# Altium PCB BF706_Core.PcbDoc (part 2 of 2)
Units mil, origin at the board's own origin, x right, y up, seen from the top; angles counter-clockwise.
Board outline 1878 x 1180 mil, 4 copper layers (Top Layer, GND, PWR, Bottom Layer), stack 40.642 mil thick; 58 components, 77 nets, 288 pads, 225 vias.
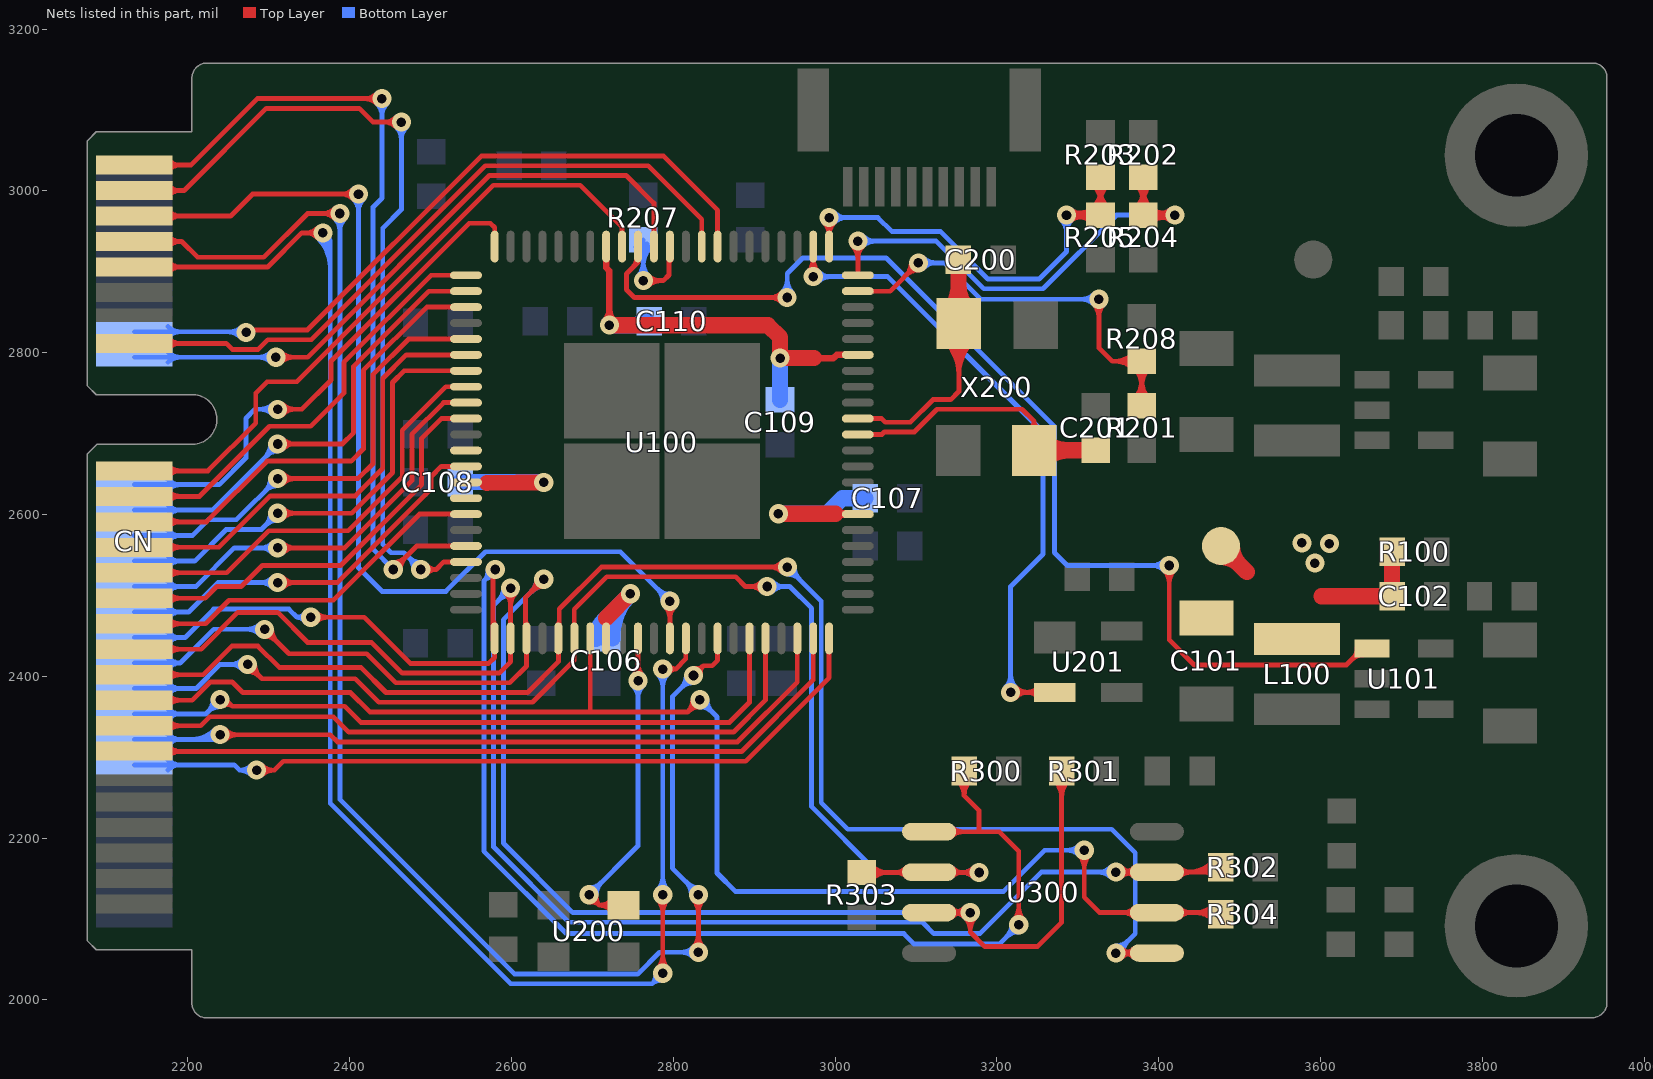
[diagram p4: the nets of this part, all layers, seen from the top]

## Via types
v1: diameter 23.62, hole 11.81, Top Layer to Bottom Layer, tented both sides, 225 vias

## Nets (pads, with @x,y where several pads share a name; then routed paths per layer and width w, separated by ;. In a path a pad name is that pad's centre, name@x,y a point inside that pad or via, vN(x,y) a via of type N, cw(c..) or ccw(c..) an arc to the next point about the centre after c; other vN are vias at no path point) (continued)
PB05: CN.40 U100.44 | length 1056.9
  Top Layer w6: v1(2285,2284) 2307,2284 2318,2295 2889.35,2295 2992.69,2398.34 U100.44@2992.69,2446.87 ; v1@2291.23,2277.77 cw(c2306.27,2262.73) 2306.27,2284 cw(c2306.27,2305.27) v1@2291.23,2290.23
  Bottom Layer w6: CN.40@2134,2290.49 2257.51,2290.49 2264,2284 ; CN.40@2175.66,2284.26 cw(c2190.7,2269.22) 2190.7,2290.49 cw(c2190.7,2311.76) CN.40@2175.66,2296.72 ; v1@2278.71,2277.83 ccw(c2264,2263.38) 2264,2284 ; v1@2278.71,2290.17 cw(c2264,2304.62) 2264,2284 ; v1(2285,2284) 2264,2284
PB06: CN.39 U100.43 | length 960.4
  Top Layer w6: CN.39@2134,2307 2884.38,2307 2973.01,2395.62 U100.43@2973.01,2446.87 ; CN.39@2175.66,2301.26 cw(c2189.53,2287.39) 2189.53,2307 ; CN.39@2175.66,2313.72 ccw(c2191.88,2329.94) 2191.88,2307
PB07: CN.38 U100.42 | length 1030.5
  Top Layer w6: v1(2240,2327.88) 2376.12,2327.88 2385,2319 2879.41,2319 2953.32,2392.91 U100.42@2953.32,2446.87 ; v1@2246.23,2321.65 cw(c2261.27,2306.61) 2261.27,2327.88 cw(c2261.27,2349.15) v1@2246.23,2334.11
  Bottom Layer w6: CN.38@2134,2321.98 2234.1,2321.98 v1(2240,2327.88) ; CN.38@2175.66,2315.75 cw(c2190.7,2300.71) 2190.7,2321.98 cw(c2190.7,2343.26) CN.38@2175.66,2328.21 ; 2204.49,2321.98 ccw(c2204.49,2363.39) v1@2233.77,2334.11 ; 2218.97,2321.98 ccw(c2218.97,2348.91) v1@2238.01,2329.87
PC02: CN.27 U100.10 | length 568.7
  Top Layer w6: CN.27@2134,2496.46 2221.46,2496.46 2236,2511 2266,2511 2292,2537 2389.06,2537 2489,2636.94 2489,2694.06 2513.47,2718.53 U100.10@2543.87,2718.53 ; CN.27@2175.66,2490.23 cw(c2190.7,2475.19) 2190.7,2496.46 cw(c2190.7,2517.74) CN.27@2175.66,2502.69
PC03: CN.26 U100.9 | length 637.7
  Top Layer w6: v1(2311,2558.67) 2393.76,2558.67 2477,2641.91 2477,2699.03 2516.18,2738.21 U100.9@2543.87,2738.21 ; v1@2317.23,2552.44 cw(c2332.27,2537.39) 2332.27,2558.67 cw(c2332.27,2579.94) v1@2317.23,2564.9
  Bottom Layer w6: CN.26@2134,2510.96 2209.96,2510.96 2257.67,2558.67 v1(2311,2558.67) ; CN.26@2175.66,2504.73 cw(c2190.7,2489.69) 2190.7,2510.96 cw(c2190.7,2532.23) CN.26@2175.66,2517.19 ; v1@2304.77,2552.44 ccw(c2289.73,2537.39) 2289.73,2558.67 ccw(c2289.73,2579.94) v1@2304.77,2564.9
PC04: CN.25 U100.8 | length 572
  Top Layer w6: CN.25@2134,2527.96 2247.96,2527.96 2300,2580 2398.12,2580 2465,2646.88 2465,2704 2518.9,2757.9 U100.8@2543.87,2757.9 ; CN.25@2175.66,2521.73 cw(c2190.7,2506.69) 2190.7,2527.96 cw(c2190.7,2549.23) CN.25@2175.66,2534.19
PC05: CN.24 U100.7 | length 672.7
  Top Layer w6: v1(2311,2601.5) 2402.65,2601.5 2453,2651.85 2453,2763.15 2467.44,2777.58 U100.7@2543.87,2777.58 ; v1@2317.23,2595.27 cw(c2332.27,2580.23) 2332.27,2601.5 cw(c2332.27,2622.77) v1@2317.23,2607.73
  Bottom Layer w6: CN.24@2134,2542.46 2208.46,2542.46 2247.45,2581.45 2290.95,2581.45 v1(2311,2601.5) ; CN.24@2175.66,2536.23 cw(c2190.7,2521.18) 2190.7,2542.46 cw(c2190.7,2563.73) CN.24@2175.66,2548.69 ; v1@2302.19,2601.5 cw(c2280.92,2601.5) 2295.96,2586.46 cw(c2311,2571.42) v1@2311,2592.69
PC06: CN.23 U100.6 | length 607
  Top Layer w6: CN.23@2134,2559.46 2238.46,2559.46 2302,2623 2407.18,2623 2441,2656.82 2441,2768.12 2470.15,2797.27 U100.6@2543.87,2797.27 ; CN.23@2175.66,2553.23 cw(c2190.7,2538.18) 2190.7,2559.46 cw(c2190.7,2580.73) CN.23@2175.66,2565.69
PC07: CN.22 U100.5 | length 675.3
  Top Layer w6: v1(2311,2644.33) 2410.33,2644.33 2429,2663 2429,2773.09 2472.86,2816.95 U100.5@2543.87,2816.95 ; v1@2317.23,2638.1 cw(c2332.27,2623.06) 2332.27,2644.33 cw(c2332.27,2665.6) v1@2317.23,2650.56
  Bottom Layer w6: CN.22@2134,2573.95 2205.64,2573.95 2225.14,2593.45 2260.12,2593.45 v1(2311,2644.33) ; CN.22@2175.66,2567.72 cw(c2190.7,2552.68) 2190.7,2573.95 cw(c2190.7,2595.22) CN.22@2175.66,2580.18 ; v1@2302.19,2644.33 cw(c2280.92,2644.33) 2295.96,2629.29 cw(c2311,2614.25) v1@2311,2635.52
PC08: CN.21 U100.3 | length 610.1
  Top Layer w6: CN.21@2134,2590.95 2222.95,2590.95 2298,2666 2402,2666 2417,2681 2417,2778.06 2495.26,2856.32 U100.3@2543.87,2856.32 ; CN.21@2175.66,2584.72 cw(c2190.7,2569.68) 2190.7,2590.95 cw(c2190.7,2612.22) CN.21@2175.66,2597.18
PC09: CN.20 U100.2 | length 670.9
  Top Layer w6: v1(2311,2687.17) 2391.17,2687.17 2405,2701 2405,2783.03 2497.98,2876.01 U100.2@2543.87,2876.01 ; v1@2317.23,2680.94 cw(c2332.27,2665.89) 2332.27,2687.17 cw(c2332.27,2708.44) v1@2317.23,2693.4
  Bottom Layer w6: CN.20@2134,2605.45 2230.49,2605.45 2311,2685.96 v1(2311,2687.17) ; CN.20@2175.66,2599.22 cw(c2190.7,2584.18) 2190.7,2605.45 cw(c2190.7,2626.72) CN.20@2175.66,2611.68 ; 2295.1,2670.06 ccw(c2277.99,2687.17) v1@2302.19,2687.17 ; 2298.03,2672.98 cw(c2311,2660.01) v1@2311,2678.36
PC10: CN.19 U100.1 | length 578.7
  Top Layer w6: CN.19@2134,2622.45 2214.45,2622.45 2301,2709 2352,2709 2393,2750 2393,2788 2500.69,2895.69 U100.1@2543.87,2895.69 ; CN.19@2175.66,2616.22 cw(c2190.7,2601.18) 2190.7,2622.45 cw(c2190.7,2643.72) CN.19@2175.66,2628.68
SCL: CN.3 U100.19 | length 1191.8
  Top Layer w6: CN.3@2134,3000.4 2195.4,3000.4 2297,3102 2412,3102 2429,3085 v1(2464,3085) ; CN.3@2175.66,2994.17 cw(c2190.7,2979.13) 2190.7,3000.4 cw(c2190.7,3021.67) CN.3@2175.66,3006.63 ; v1@2457.77,3078.77 ccw(c2442.73,3063.73) 2442.73,3085 ccw(c2442.73,3106.27) v1@2457.77,3091.23 ; v1(2488,2532) 2507,2532 ; v1@2494.73,2526.31 cw(c2507,2515.92) 2507,2532 ; v1@2494.73,2537.69 ccw(c2507,2548.08) 2507,2532 ; U100.19@2543.87,2541.36 2516.36,2541.36 2507,2532
  Bottom Layer w6: v1@2457.77,3078.77 cw(c2442.73,3063.73) 2464,3063.73 cw(c2485.27,3063.73) v1@2470.23,3078.77 ; v1(2464,3085) 2464,2977 2441,2954 2441,2563 2451.19,2552.81 2467.19,2552.81 v1(2488,2532) ; v1@2479.19,2532 ccw(c2457.92,2532) 2472.96,2547.04 ccw(c2488,2562.08) v1@2488,2540.81
SDA: CN.1 U100.18 | length 1172.5
  Top Layer w6: CN.1@2134,3031.9 2203.9,3031.9 2286,3114 v1(2440,3114) ; CN.1@2175.66,3025.67 cw(c2190.7,3010.63) 2190.7,3031.9 cw(c2190.7,3053.17) CN.1@2175.66,3038.13 ; v1@2433.77,3107.77 ccw(c2418.73,3092.73) 2418.73,3114 ccw(c2418.73,3135.27) v1@2433.77,3120.23 ; v1(2454,2532) 2483.05,2561.05 U100.18@2543.87,2561.05 ; v1@2454,2540.81 ccw(c2454,2562.08) 2469.04,2547.04 ccw(c2484.08,2532) v1@2462.81,2532
  Bottom Layer w6: v1@2433.77,3107.77 cw(c2418.73,3092.73) 2440,3092.73 cw(c2461.27,3092.73) v1@2446.23,3107.77 ; v1(2440,3114) 2440,2991 2429,2980 2429,2557 v1(2454,2532)
SPI1_CLK: CN.18 U100.88 | length 747.4
  Top Layer w6: v1(2311,2730) 2341,2730 2377,2766 2377,2789.24 2547.76,2960 2574,2960 2579.31,2954.69 U100.88@2579.31,2931.13 ; v1@2317.23,2723.77 cw(c2332.27,2708.73) 2332.27,2730 cw(c2332.27,2751.27) v1@2317.23,2736.23
  Bottom Layer w6: CN.18@2134,2636.94 2238.94,2636.94 2272,2670 2272,2719 2283,2730 v1(2311,2730) ; CN.18@2175.66,2630.71 cw(c2190.7,2615.67) 2190.7,2636.94 cw(c2190.7,2658.22) CN.18@2175.66,2643.18 ; v1@2304.77,2723.77 ccw(c2289.73,2708.73) 2289.73,2730 ccw(c2289.73,2751.27) v1@2304.77,2736.23
SPI1_MISO: CN.17 U100.80 | length 849.7
  Top Layer w6: CN.17@2134,2653.94 2224.94,2653.94 2284,2713 2284,2750 2298,2764 2334.79,2764 2577.79,3007 2685,3007 2736.79,2955.21 U100.80@2736.79,2931.13 ; CN.17@2175.66,2647.71 cw(c2190.7,2632.67) 2190.7,2653.94 cw(c2190.7,2675.22) CN.17@2175.66,2660.18
SPI1_MOSI: CN.16 U100.78 | length 903.3
  Top Layer w6: v1(2309,2794.42) 2348.24,2794.42 2572.82,3019 2742,3019 2776.16,2984.84 U100.78@2776.16,2931.13 ; v1@2315.23,2788.19 cw(c2330.27,2773.15) 2330.27,2794.42 cw(c2330.27,2815.69) v1@2315.23,2800.65
  Bottom Layer w6: CN.16@2134,2794.42 v1(2309,2794.42) ; CN.16@2175.66,2788.19 cw(c2190.7,2773.15) 2190.7,2794.42 cw(c2190.7,2815.7) CN.16@2175.66,2800.66 ; 2287.71,2794.42 cw(c2287.71,2773.13) v1@2302.77,2788.19 ; 2287.75,2794.42 ccw(c2287.75,2815.67) v1@2302.77,2800.65
SPI1_SEL1: CN.14 U100.74 | length 949.5
  Top Layer w6: v1@2272,2828 2347.88,2828 2562.88,3043 2788,3043 2854.9,2976.1 U100.74@2854.9,2931.13
  Bottom Layer w6: CN.14@2134,2825.92 v1@2272,2825.92 ; CN.14@2175.66,2819.69 cw(c2190.7,2804.65) 2190.7,2825.92 cw(c2190.7,2847.19) CN.14@2175.66,2832.15 ; 2248.5,2825.92 cw(c2248.5,2801.5) v1@2265.77,2818.77 ; 2252.95,2825.92 ccw(c2252.95,2844.05) v1@2265.77,2831.23
  other v1: 2272,2825
SPI1_SEL2: CN.15 U100.75 | length 892.8
  Top Layer w6: CN.15@2134,2811.42 2247.58,2811.42 2255,2804 2287,2804 2299,2816 2352.85,2816 2567.85,3031 2769,3031 2835.21,2964.79 U100.75@2835.21,2931.13 ; CN.15@2175.66,2805.19 cw(c2190.7,2790.15) 2190.7,2811.42 cw(c2190.7,2832.7) CN.15@2175.66,2817.66
SPI2_CLK: CN.35 R304.1 U100.29 U300.6 | length 2062.9
  Top Layer w6: CN.35@2134,2370.48 2205.48,2370.48 2228,2393 2255,2393 2268,2380 2401,2380 2425,2356 2697.42,2356 ; CN.35@2175.66,2364.25 cw(c2190.7,2349.21) 2190.7,2370.48 cw(c2190.7,2391.75) CN.35@2175.66,2376.71 ; U100.29@2699,2448.46 U100.29@2697.42,2446.87 2697.42,2356 ; v1@2824.19,2370.98 cw(c2803.06,2370.94) 2818,2356 ; v1@2832.98,2362.19 ccw(c2832.94,2341.06) 2818,2356 ; v1(2833,2371) 2818,2356 ; v1@3301.77,2178.77 cw(c3286.73,2163.73) 3308,2163.73 cw(c3329.27,2163.73) v1@3314.23,2178.77 ; v1(3308,2185) 3308,2127 3327,2108 U300.6@3397.75,2108 R304.1@3474.44,2108 ; U300.6@3369.58,2102.47 ccw(c3356.22,2089.1) 3356.22,2108 ccw(c3356.22,2126.9) U300.6@3369.58,2113.53 ; U300.6@3425.92,2102.47 cw(c3439.28,2089.1) 3439.28,2108 cw(c3439.28,2126.9) U300.6@3425.92,2113.53 ; 3445.59,2108 cw(c3445.59,2077.12) R304.1@3467.43,2098.95 ; 3445.74,2108 ccw(c3445.74,2138.67) R304.1@3467.43,2116.98 ; 3460.07,2108 cw(c3460.07,2091.6) R304.1@3471.67,2103.2 ; 3460.23,2108 ccw(c3460.23,2124.18) R304.1@3471.67,2112.74 ; 2697.42,2356 2818,2356
  Bottom Layer w6: v1@2833,2362.19 cw(c2833,2340.92) 2848.04,2355.96 cw(c2863.08,2371) v1@2841.81,2371 ; v1(2833,2371) 2854.09,2349.91 2854.09,2156.91 2877,2134 3208,2134 3259,2185 v1(3308,2185) ; v1@3301.77,2178.77 ccw(c3286.73,2163.73) 3286.73,2185 ccw(c3286.73,2206.27) v1@3301.77,2191.23
SPI2_D2: CN.32 R301.2 U100.25 U300.3 | length 2420.4
  Top Layer w6: v1@2295,2449.31 cw(c2295,2428.03) 2310.04,2443.08 cw(c2325.08,2458.12) v1@2303.81,2458.12 ; v1(2295,2458.12) 2325.12,2428 2421,2428 2457,2392 2598,2392 2618.68,2412.68 U100.25@2618.68,2446.87 2617.55,2448 2617.55,2497.55 v1(2640,2520) ; 2617.55,2468.99 ccw(c2626.03,2468.99) U100.25@2620.04,2463 ; v1@2631.19,2520 cw(c2609.92,2520) 2624.96,2504.96 cw(c2640,2489.92) v1@2640,2511.19 ; U300.3@3116.25,2108 v1(3167,2108) 3167,2084 3185,2066 3250,2066 3279.94,2095.94 R301.2@3279.94,2283 ; U300.3@3144.42,2102.47 cw(c3157.79,2089.1) 3157.79,2108 cw(c3157.79,2126.9) U300.3@3144.42,2113.53 ; v1@3159.17,2103.95 ccw(c3149.51,2098.96) 3152.33,2109.46 ccw(c3153.94,2115.49) v1@3159.36,2112.38 ; v1@3159.17,2112.05 cw(c3149.51,2117.04) 3152.33,2106.54 cw(c3153.94,2100.51) v1@3159.36,2103.62 ; v1@3160.77,2114.23 cw(c3145.73,2129.27) 3145.73,2108 cw(c3145.73,2086.73) 3160.77,2101.77 cw(c3145.73,2086.73) 3167,2086.73 cw(c3188.27,2086.73) v1@3173.23,2101.77 ; R301.2@3270.93,2272.02 cw(c3249.16,2250.26) 3279.94,2250.26 cw(c3310.72,2250.26) R301.2@3288.96,2272.02 ; R301.2@3275.17,2276.26 cw(c3263.65,2264.74) 3279.94,2264.74 cw(c3296.23,2264.74) R301.2@3284.71,2276.26
  Bottom Layer w6: CN.32@2134,2416.47 2190.47,2416.47 ; CN.32@2175.71,2410.29 cw(c2190.47,2395.76) 2190.47,2416.47 ; CN.32@2175.71,2422.65 ccw(c2190.47,2437.18) 2190.47,2416.47 ; v1@2288.77,2451.89 ccw(c2273.73,2436.85) 2273.73,2458.12 ccw(c2273.73,2479.39) v1@2288.77,2464.35 ; v1(2295,2458.12) 2232.12,2458.12 2190.47,2416.47 ; v1@2631.19,2520 cw(c2609.92,2520) 2624.96,2504.96 cw(c2640,2489.92) v1@2640,2511.19 ; v1(2640,2520) 2590,2470 2590,2194 2676,2108 v1(3167,2108) ; v1@3160.77,2101.77 ccw(c3145.73,2086.73) 3145.73,2108 ccw(c3145.73,2129.27) v1@3160.77,2114.23
SPI2_D3: CN.31 R302.2 U100.24 U300.7 | length 2241.5
  Top Layer w6: CN.31@2134,2433.47 2216.47,2433.47 2262,2479 2311,2479 2348,2442 2427,2442 2465,2404 2585,2404 2598.99,2417.99 U100.24@2598.99,2446.87 ; CN.31@2175.66,2427.24 cw(c2190.7,2412.2) 2190.7,2433.47 cw(c2190.7,2454.74) CN.31@2175.66,2439.7 ; v1@2592.77,2502.77 cw(c2577.73,2487.73) 2599,2487.73 cw(c2620.27,2487.73) v1@2605.23,2502.77 ; U100.24@2598.99,2446.87 v1(2599,2509) ; v1(3347,2158) U300.7@3397.75,2158 R302.2@3470.44,2158 ; v1@3353.23,2151.77 cw(c3368.27,2136.73) 3368.27,2158 cw(c3368.27,2179.27) v1@3353.23,2164.23 ; v1@3354.64,2153.62 cw(c3360.06,2150.51) 3361.67,2156.54 cw(c3364.49,2167.04) v1@3354.83,2162.05 ; v1@3354.64,2162.38 ccw(c3360.06,2165.49) 3361.67,2159.46 ccw(c3364.49,2148.96) v1@3354.83,2153.95 ; U300.7@3369.58,2152.47 ccw(c3356.22,2139.1) 3356.22,2158 ccw(c3356.22,2176.9) U300.7@3369.58,2163.53 ; U300.7@3425.92,2152.47 cw(c3439.28,2139.1) 3439.28,2158 cw(c3439.28,2176.9) U300.7@3425.92,2163.53 ; 3435.93,2158 ccw(c3435.93,2202.54) R302.2@3467.43,2171.05 ; 3450.42,2158 ccw(c3450.42,2188.06) R302.2@3471.67,2166.8 ; 3455.4,2158 cw(c3455.4,2140.99) R302.2@3467.43,2153.02
  Bottom Layer w6: v1@2590.19,2509 cw(c2568.92,2509) 2583.96,2493.96 cw(c2599,2478.92) v1@2599,2500.19 ; v1(2599,2509) 2578,2488 2578,2189.03 2671.03,2096 3108,2096 3122,2082 3179,2082 3255,2158 v1(3347,2158) ; v1@3340.77,2151.77 ccw(c3325.73,2136.73) 3325.73,2158 ccw(c3325.73,2179.27) v1@3340.77,2164.23
SPI2_MISO: CN.34 R303.2 U100.28 U300.2 | length 1983.9
  Top Layer w6: v1@2274,2405.89 cw(c2274,2384.62) 2289.04,2399.66 cw(c2304.08,2414.71) v1@2282.81,2414.71 ; v1(2274,2414.71) 2291.71,2397 2407,2397 2436,2368 2626,2368 2677.73,2419.73 U100.28@2677.73,2446.87 2677.73,2482.73 2718,2523 2877,2523 2889,2511 v1(2916,2511) ; v1@2909.77,2504.77 ccw(c2894.73,2489.73) 2894.73,2511 ccw(c2894.73,2532.27) v1@2909.77,2517.23 ; R303.2@3033,2157.56 v1(3178,2157.56) ; R303.2@3039.74,2152.79 cw(c3051.26,2141.27) 3051.26,2157.56 cw(c3051.26,2173.85) R303.2@3039.74,2162.33 ; R303.2@3043.98,2148.54 cw(c3065.74,2126.78) 3065.74,2157.56 cw(c3065.74,2188.34) R303.2@3043.98,2166.57 ; 3073.65,2157.56 ccw(c3073.65,2177.96) U300.2@3088.08,2163.53 ; 3075.78,2157.56 cw(c3075.78,2140.17) U300.2@3088.08,2152.47 ; U300.2@3144.42,2152.47 cw(c3156.72,2140.17) 3156.72,2157.56 ; U300.2@3144.42,2163.53 ccw(c3158.85,2177.96) 3158.85,2157.56 ; v1@3171.77,2151.33 ccw(c3156.73,2136.29) 3156.73,2157.56 ccw(c3156.73,2178.83) v1@3171.77,2163.79
  Bottom Layer w6: CN.34@2134,2384.98 2210.27,2384.98 2240,2414.71 v1(2274,2414.71) ; CN.34@2175.66,2378.75 cw(c2190.7,2363.7) 2190.7,2384.98 cw(c2190.7,2406.25) CN.34@2175.66,2391.21 ; v1@2267.77,2408.47 ccw(c2252.73,2393.43) 2252.73,2414.71 ccw(c2252.73,2435.98) v1@2267.77,2420.94 ; v1(2916,2511) 2944,2511 2971,2484 2971,2238.88 3052.32,2157.56 v1(3178,2157.56) ; v1@2922.23,2504.77 cw(c2937.27,2489.73) 2937.27,2511 cw(c2937.27,2532.27) v1@2922.23,2517.23 ; v1@3171.77,2151.33 ccw(c3156.73,2136.29) 3156.73,2157.56 ccw(c3156.73,2178.83) v1@3171.77,2163.79
SPI2_MOSI: CN.33 U100.27 U300.5 | length 2091.8
  Top Layer w6: CN.33@2134,2401.98 2218.98,2401.98 2254.31,2437.31 2286.69,2437.31 2313,2411 2414,2411 2445,2380 2620,2380 2658.05,2418.05 U100.27@2658.05,2446.87 2659.17,2448 2659.17,2483.17 2711,2535 v1(2941,2535) ; CN.33@2175.66,2395.75 cw(c2190.7,2380.7) 2190.7,2401.98 cw(c2190.7,2423.25) CN.33@2175.66,2408.21 ; U100.27@2656.69,2463 ccw(c2650.69,2468.99) 2659.17,2468.99 ; v1@2934.77,2528.77 ccw(c2919.73,2513.73) 2919.73,2535 ccw(c2919.73,2556.27) v1@2934.77,2541.23 ; v1(3347,2058) U300.5@3397.75,2058 ; v1@3353.23,2051.77 cw(c3368.27,2036.73) 3368.27,2058 cw(c3368.27,2079.27) v1@3353.23,2064.23 ; v1@3354.64,2053.62 cw(c3360.06,2050.51) 3361.67,2056.54 cw(c3364.49,2067.04) v1@3354.83,2062.05 ; v1@3354.64,2062.38 ccw(c3360.06,2065.49) 3361.67,2059.46 ccw(c3364.49,2048.96) v1@3354.83,2053.95 ; U300.5@3369.58,2052.47 ccw(c3356.22,2039.1) 3356.22,2058 ccw(c3356.22,2076.9) U300.5@3369.58,2063.53
  Bottom Layer w6: v1@2941,2526.19 cw(c2941,2504.92) 2956.04,2519.96 cw(c2971.08,2535) v1@2949.81,2535 ; v1(2941,2535) 2983,2493 2983,2243.85 3015.85,2211 3342,2211 3371,2182 3371,2082 v1(3347,2058) ; v1@3347,2066.81 ccw(c3347,2088.08) 3362.04,2073.04 ccw(c3377.08,2058) v1@3355.81,2058
SPI2_SEL1: CN.30 R300.2 U100.23 U300.1 | length 2233.4
  Top Layer w6: v1(2352,2473) 2418,2473 2475,2416 2572,2416 2579.31,2423.31 2577.32,2446.71 2577.31,2446.87 v1@2577.31,2531.31 ; v1@2358.23,2466.77 cw(c2373.27,2451.73) 2373.27,2473 cw(c2373.27,2494.27) v1@2358.23,2479.23 ; 2577.31,2471.1 ccw(c2588.77,2471.1) U100.23@2580.67,2463 ; U300.1@3116.25,2208 3178,2208 ; U300.1@3144.42,2202.47 cw(c3157.79,2189.1) 3157.79,2208 cw(c3157.79,2226.9) U300.1@3144.42,2213.53 ; R300.2@3150.95,2271.52 cw(c3134.02,2252.56) 3159.44,2252.56 ; R300.2@3159.44,2283 3159.44,2252.56 ; R300.2@3167.93,2271.52 ccw(c3184.86,2252.56) 3159.44,2252.56 ; v1@3220.77,2099.23 ccw(c3205.73,2114.27) 3227,2114.27 ccw(c3248.27,2114.27) v1@3233.23,2099.23 ; v1(3227,2093) 3227,2184 3203,2208 3178,2208 ; 3159.44,2252.56 3178,2234 3178,2208
  Bottom Layer w6: CN.30@2134,2447.97 2196.97,2447.97 2232,2483 2325,2483 2335,2473 ; CN.30@2175.66,2441.74 cw(c2190.7,2426.7) 2190.7,2447.97 cw(c2190.7,2469.24) CN.30@2175.66,2454.2 ; v1@2344.8,2467.92 ccw(c2335,2461.01) 2335,2473 ; v1@2344.8,2478.08 cw(c2335,2484.99) 2335,2473 ; v1(2352,2473) 2335,2473 ; v1@2571.2,2531.54 cw(c2553.39,2530.61) 2566,2518 ; v1@2579.54,2523.2 ccw(c2578.61,2505.39) 2566,2518 ; v1(2580,2532) 2566,2518 ; v1@3218.19,2093 cw(c3196.92,2093) 3211.96,2077.96 cw(c3227,2062.92) v1@3227,2084.19 ; v1(3227,2093) 3203,2069 3098,2069 3085,2082 2668.06,2082 2566,2184.06 2566,2518
SYS_BMODE0: R202.2 R204.1 U100.66 | length 990.1
  Top Layer w6: v1@3021.9,2931.64 cw(c3006.85,2916.6) 3028.13,2916.6 cw(c3049.4,2916.6) v1@3034.36,2931.64 ; U100.66@3028.13,2895.69 v1(3028.13,2937.87) ; R204.1@3371.99,2979.01 ccw(c3350.22,3000.78) 3381,3000.78 ccw(c3411.78,3000.78) R204.1@3390.01,2979.01 ; R202.2@3371.99,3007.87 cw(c3350.22,2986.11) 3381,2986.11 cw(c3411.78,2986.11) R202.2@3390.01,3007.87 ; R204.1@3376.23,2974.77 ccw(c3364.71,2986.29) 3381,2986.29 ccw(c3397.29,2986.29) R204.1@3385.77,2974.77 ; R202.2@3376.23,3012.11 cw(c3364.71,3000.59) 3381,3000.59 cw(c3397.29,3000.59) R202.2@3385.77,3012.11 ; R202.2@3381,3016.88 R204.1@3381,2970 v1(3420,2970) ; R204.1@3387.74,2965.23 cw(c3399.26,2953.71) 3399.26,2970 cw(c3399.26,2986.29) R204.1@3387.74,2974.77 ; R204.1@3391.98,2960.99 cw(c3413.74,2939.22) 3413.74,2970 cw(c3413.74,3000.78) R204.1@3391.98,2979.01 ; 3401.07,2966.6 cw(c3404.69,2953.06) v1@3414.09,2963.46 ; 3401.07,2973.4 ccw(c3404.69,2986.94) v1@3414.09,2976.54 ; 3402.81,2967.07 ccw(c3398.73,2982.28) v1@3412.37,2974.41 ; 3402.81,2972.93 cw(c3398.73,2957.72) v1@3412.37,2965.59 ; v1@3413.77,2963.77 ccw(c3398.73,2948.73) 3398.73,2970 ccw(c3398.73,2991.27) v1@3413.77,2976.23
  Bottom Layer w6: v1(3028.13,2937.87) 3125.13,2937.87 3184,2879 3257,2879 3348,2970 v1(3420,2970) ; v1@3034.36,2931.64 cw(c3049.4,2916.6) 3049.4,2937.87 cw(c3049.4,2959.15) v1@3034.36,2944.1 ; v1@3413.77,2963.77 ccw(c3398.73,2948.73) 3398.73,2970 ccw(c3398.73,2991.27) v1@3413.77,2976.23
SYS_BMODE1: R203.2 R205.1 U100.67 | length 917.3
  Top Layer w6: v1@2986.46,2960.77 cw(c2971.42,2945.73) 2992.69,2945.73 cw(c3013.96,2945.73) v1@2998.92,2960.77 ; U100.67@2992.69,2931.13 v1(2992.69,2967) ; v1(3286,2970) R205.1@3328,2970 R203.2@3328,3016.88 ; v1@3291.87,2963.43 cw(c3302.51,2951.55) 3306.63,2966.95 ; v1@3291.87,2976.57 ccw(c3302.51,2988.45) 3306.63,2973.05 ; v1@3292.23,2963.77 cw(c3307.27,2948.73) 3307.27,2970 cw(c3307.27,2991.27) v1@3292.23,2976.23 ; v1@3293.63,2965.59 cw(c3304.97,2959.05) 3301.58,2971.7 ; v1@3293.63,2974.41 ccw(c3304.97,2980.95) 3301.58,2968.3 ; R205.1@3317.02,2960.99 ccw(c3295.26,2939.22) 3295.26,2970 ccw(c3295.26,3000.78) R205.1@3317.02,2979.01 ; R205.1@3318.99,2979.01 ccw(c3297.22,3000.78) 3328,3000.78 ccw(c3358.78,3000.78) R205.1@3337.01,2979.01 ; R203.2@3318.99,3007.87 cw(c3297.22,2986.11) 3328,2986.11 cw(c3358.78,2986.11) R203.2@3337.01,3007.87 ; R205.1@3321.26,2965.23 ccw(c3309.74,2953.71) 3309.74,2970 ccw(c3309.74,2986.29) R205.1@3321.26,2974.77 ; R205.1@3323.23,2974.77 ccw(c3311.71,2986.29) 3328,2986.29 ccw(c3344.29,2986.29) R205.1@3332.77,2974.77 ; R203.2@3323.23,3012.11 cw(c3311.71,3000.59) 3328,3000.59 cw(c3344.29,3000.59) R203.2@3332.77,3012.11
  Bottom Layer w6: v1(2992.69,2967) 3052.97,2967 3070.1,2949.87 3130.1,2949.87 3188.97,2891 3252.03,2891 3286,2924.97 v1@3286,2971 ; v1@2998.92,2960.77 cw(c3013.96,2945.73) 3013.96,2967 cw(c3013.96,2988.27) v1@2998.92,2973.23 ; v1@3279.77,2963.77 cw(c3264.73,2948.73) 3286,2948.73 cw(c3307.27,2948.73) v1@3292.23,2963.77
SYS_CLKIN: C200.1 U100.57 X200.1 | length 582.7
  Top Layer w6: U100.57@3028.13,2718.53 3057.47,2718.53 3062,2714 3093.03,2714 3121.03,2742 3143,2742 3153,2752 X200.1@3153,2836 ; X200.1@3135.63,2814.7 cw(c3093.71,2772.77) 3153,2772.77 cw(c3212.29,2772.77) X200.1@3170.37,2814.7 ; X200.1@3139.88,2818.94 cw(c3108.19,2787.26) 3153,2787.26 cw(c3197.81,2787.26) X200.1@3166.12,2818.94 ; X200.1@3144.12,2823.18 cw(c3122.68,2801.74) 3153,2801.74 cw(c3183.32,2801.74) X200.1@3161.88,2823.18
  Top Layer w20: X200.1@3140.58,2852.35 ccw(c3111.96,2880.98) 3152.44,2880.98 ; X200.1@3152.44,2836.56 C200.1@3152.44,2915 ; 3152.44,2883.68 ccw(c3196.74,2883.68) X200.1@3165.42,2852.35
SYS_CLKOUT: U100.12
SYS_EXTWAKE: U100.79 U101.1 | length 1559.7
  Top Layer w6: 2750.04,2905.47 ccw(c2739.15,2916.36) U100.79@2754.55,2916.36 ; U100.79@2756.47,2931.13 2756.47,2911.9 2742.19,2897.62 2742.19,2877.81 2751.81,2868.19 v1(2940.81,2868.19) ; v1@2934.58,2861.96 ccw(c2919.54,2846.92) 2919.54,2868.19 ccw(c2919.54,2889.46) v1@2934.58,2874.42 ; v1@3406.77,2530.77 cw(c3391.73,2515.73) 3413,2515.73 cw(c3434.27,2515.73) v1@3419.23,2530.77 ; v1(3413,2537) 3413,2445 3444,2414 3632,2414 3652.4,2434.4 U101.1@3663.63,2434.4 ; 3638.76,2420.76 cw(c3652.8,2406.71) U101.1@3652.8,2426.57 ; 3639.73,2421.73 ccw(c3627.05,2434.4) U101.1@3644.98,2434.4
  Bottom Layer w6: v1@2934.58,2874.42 ccw(c2919.54,2889.46) 2940.81,2889.46 ccw(c2962.08,2889.46) v1@2947.04,2874.42 ; v1(2940.81,2868.19) 2940.81,2897.81 2960,2917 3063,2917 3271,2709 3271,2553 3287,2537 v1(3413,2537) ; v1@3406.77,2530.77 ccw(c3391.73,2515.73) 3391.73,2537 ccw(c3391.73,2558.27) v1@3406.77,2543.23
SYS_FAULT: R201.2 R208.2 U100.65 | length 861.2
  Top Layer w6: U100.65@3028.13,2876.01 3068.01,2876.01 v1(3103,2911) ; v1@3094.19,2911 cw(c3072.92,2911) 3087.96,2895.96 cw(c3103,2880.92) v1@3103,2902.19 ; v1@3319.77,2859.77 cw(c3304.73,2844.73) 3326,2844.73 cw(c3347.27,2844.73) v1@3332.23,2859.77 ; v1(3326,2866) 3326,2806 3342.56,2789.44 R208.2@3379,2789.44 R201.2@3379,2734.56 ; R208.2@3368.02,2780.43 ccw(c3346.26,2758.66) 3346.26,2789.44 ccw(c3346.26,2820.22) R208.2@3368.02,2798.46 ; R201.2@3369.99,2743.57 ccw(c3348.22,2765.34) 3379,2765.34 ccw(c3409.78,2765.34) R201.2@3388.01,2743.57 ; R208.2@3369.99,2780.43 cw(c3348.22,2758.66) 3379,2758.66 cw(c3409.78,2758.66) R208.2@3388.01,2780.43 ; R208.2@3372.26,2784.67 ccw(c3360.74,2773.15) 3360.74,2789.44 ccw(c3360.74,2805.73) R208.2@3372.26,2794.21 ; R201.2@3374.23,2739.33 ccw(c3362.71,2750.85) 3379,2750.85 ccw(c3395.29,2750.85) R201.2@3383.77,2739.33 ; R208.2@3374.23,2784.67 cw(c3362.71,2773.15) 3379,2773.15 cw(c3395.29,2773.15) R208.2@3383.77,2784.67
  Bottom Layer w6: v1(3103,2911) 3135,2911 3180,2866 v1(3326,2866) ; v1@3109.23,2904.77 cw(c3124.27,2889.73) 3124.27,2911 cw(c3124.27,2932.27) v1@3109.23,2917.23 ; v1@3319.77,2859.77 ccw(c3304.73,2844.73) 3304.73,2866 ccw(c3304.73,2887.27) v1@3319.77,2872.23
SYS_HWRSTN: U100.68 U201.2 | length 960.7
  Top Layer w6: v1@2966.78,2900.22 ccw(c2951.74,2915.26) 2973.01,2915.26 ccw(c2994.28,2915.26) v1@2979.24,2900.22 ; v1(2973.01,2893.99) U100.68@2973.01,2931.13 ; v1(3217,2380.2) U201.2@3271.66,2380.2 ; v1@3223.23,2373.97 cw(c3238.27,2358.93) 3238.27,2380.2 cw(c3238.27,2401.48) v1@3223.23,2386.44 ; U201.2@3251.65,2373.97 ccw(c3236.61,2358.93) 3236.61,2380.2 ccw(c3236.61,2401.48) U201.2@3251.65,2386.44
  Bottom Layer w6: v1(2973.01,2893.99) 3065.01,2893.99 3257,2702 3257,2551 3217,2511 v1(3217,2380.2) ; v1@2979.24,2887.76 cw(c2994.28,2872.72) 2994.28,2893.99 cw(c2994.28,2915.26) v1@2979.24,2900.22 ; v1@3210.77,2386.44 ccw(c3195.73,2401.48) 3217,2401.48 ccw(c3238.27,2401.48) v1@3223.23,2386.44
SYS_NMI: R207.2 U100.77 | length 268.1
  Top Layer w6: v1(2763,2889) 2787.72,2889 2794.72,2896 2794.72,2930 U100.77@2795.84,2931.13 ; v1@2769.23,2882.77 cw(c2784.27,2867.73) 2784.27,2889 cw(c2784.27,2910.27) v1@2769.23,2895.23 ; 2794.72,2909.01 cw(c2803.2,2909.01) U100.77@2797.2,2915
  Bottom Layer w6: R207.2@2753.99,2930.43 cw(c2732.22,2908.66) 2763,2908.66 cw(c2793.78,2908.66) R207.2@2772.01,2930.43 ; v1@2756.77,2895.23 ccw(c2741.73,2910.27) 2763,2910.27 ccw(c2784.27,2910.27) v1@2769.23,2895.23 ; R207.2@2758.23,2934.67 cw(c2746.71,2923.15) 2763,2923.15 cw(c2779.29,2923.15) R207.2@2767.77,2934.67 ; v1(2763,2889) R207.2@2763,2939.44
SYS_RESOUT: U100.15
SYS_XTAL: C201.1 U100.56 X200.3 | length 437.8
  Top Layer w6: U100.56@3028.13,2698.84 3057.84,2698.84 3061,2702 3098,2702 3126,2730 3231,2730 3246,2715 ; X200.3@3239.6,2706.65 ccw(c3237.35,2715) 3246,2715 ; X200.3@3246,2679 3246,2715 ; X200.3@3252.4,2706.65 cw(c3254.65,2715) 3246,2715
  Top Layer w20: X200.3@3246.44,2679.44 C201.1@3322,2679.44 ; X200.3@3258.42,2666.58 cw(c3289.46,2635.54) 3289.46,2679.44 ; X200.3@3258.42,2691.42 ccw(c3287.33,2720.33) 3287.33,2679.44
UART0_RX: CN.36 U100.39 | length 946.5
  Top Layer w6: v1(2240,2371.29) 2246.71,2371.29 2255,2363 ; v1@2244.91,2363.98 cw(c2249.36,2357.36) 2255,2363 ; U100.39@2894.27,2446.87 2894.27,2367.8 2869.47,2343 2414,2343 2394,2363 2255,2363
  Bottom Layer w6: CN.36@2134,2353.48 2222.19,2353.48 v1(2240,2371.29) ; CN.36@2175.66,2347.25 cw(c2190.7,2332.21) 2190.7,2353.48 cw(c2190.7,2374.75) CN.36@2175.66,2359.71 ; v1@2231.19,2371.29 cw(c2209.92,2371.29) 2224.96,2356.25 cw(c2240,2341.21) v1@2240,2362.48
UART0_TX: CN.37 U100.40 | length 918.5
  Top Layer w6: CN.37@2134,2338.98 2215.98,2338.98 2227,2350 2380,2350 2399,2331 2874.44,2331 2913.95,2370.51 U100.40@2913.95,2446.87 ; CN.37@2175.66,2332.75 cw(c2190.7,2317.71) 2190.7,2338.98 cw(c2190.7,2360.26) CN.37@2175.66,2345.21
UART1_RX: CN.28 U100.13 | length 593.5
  Top Layer w6: v1(2311,2515.83) 2384.86,2515.83 2501,2631.97 2501,2647 2513.47,2659.47 U100.13@2543.87,2659.47 ; v1@2317.23,2509.6 cw(c2332.27,2494.56) 2332.27,2515.83 cw(c2332.27,2537.1) v1@2317.23,2522.06
  Bottom Layer w6: CN.28@2134,2479.46 2200.97,2479.46 2237.33,2515.83 v1(2311,2515.83) ; CN.28@2175.66,2473.23 cw(c2190.7,2458.19) 2190.7,2479.46 cw(c2190.7,2500.74) CN.28@2175.66,2485.69 ; v1@2304.77,2509.6 ccw(c2289.73,2494.56) 2289.73,2515.83 ccw(c2289.73,2537.1) v1@2304.77,2522.06
UART1_TX: CN.29 U100.16 | length 499.4
  Top Layer w6: CN.29@2134,2464.97 2221.97,2464.97 2251,2494 2380,2494 2486.42,2600.42 U100.16@2543.87,2600.42 ; CN.29@2175.66,2458.74 cw(c2190.7,2443.7) 2190.7,2464.97 cw(c2190.7,2486.24) CN.29@2175.66,2471.2
USB_XTAL_IN: U100.32 U200.3 | length 553
  Top Layer w6: v1(2696,2130) 2709,2117 ; v1@2696.95,2121.24 cw(c2698.55,2106.55) 2709,2117 ; v1@2704.76,2129.05 ccw(c2719.45,2127.45) 2709,2117 ; U200.3@2724.43,2108.79 ccw(c2709,2098.41) 2709,2117 ; U200.3@2724.43,2125.21 cw(c2709,2135.59) 2709,2117 ; U200.3@2738.61,2117 2709,2117 ; v1@2750.24,2400.7 ccw(c2735.2,2415.74) 2756.47,2415.74 ccw(c2777.74,2415.74) v1@2762.7,2400.7 ; v1(2756.47,2394.47) U100.32@2756.47,2446.87
  Bottom Layer w6: v1(2696,2130) 2756.47,2190.47 v1(2756.47,2394.47) ; v1@2696,2138.81 ccw(c2696,2160.08) 2711.04,2145.04 ccw(c2726.08,2130) v1@2704.81,2130 ; v1@2750.24,2388.24 cw(c2735.2,2373.2) 2756.47,2373.2 cw(c2777.74,2373.2) v1@2762.7,2388.24
USBD+: CN.9 U100.35 | length 2243.9
  Top Layer w6: CN.9@2137.72,2902.19 CN.9@2134,2905.91 2298.91,2905.91 2341,2948 v1(2367,2948) ; CN.9@2175.66,2899.68 cw(c2190.7,2884.64) 2190.7,2905.91 cw(c2190.7,2927.18) CN.9@2175.66,2912.14 ; v1@2360.77,2941.77 ccw(c2345.73,2926.73) 2345.73,2948 ccw(c2345.73,2969.27) v1@2360.77,2954.23 ; v1@2780.77,2039.23 ccw(c2765.73,2054.27) 2787,2054.27 ccw(c2808.27,2054.27) v1@2793.23,2039.23 ; v1@2780.77,2123.77 cw(c2765.73,2108.73) 2787,2108.73 cw(c2808.27,2108.73) v1@2793.23,2123.77 ; v1(2787,2033) v1(2787,2130) ; v1(2787,2409) 2803,2409 ; v1@2794.45,2404.29 cw(c2803,2398.88) 2803,2409 ; v1@2794.45,2413.71 ccw(c2803,2419.12) 2803,2409 ; U100.35@2815.53,2446.87 2815.53,2421.53 2803,2409
  Bottom Layer w6: v1@2360.77,2941.77 cw(c2324,2905) 2376,2905 ; v1@2365.01,2946.01 cw(c2338.49,2919.49) 2376,2919.49 ; v1(2367,2948) 2376,2939 2376,2243 2599,2020 2774,2020 ; v1@2369.25,2950.25 cw(c2352.97,2933.97) 2376,2933.97 ; v1@2778.24,2032.05 cw(c2763.55,2030.45) 2774,2020 ; v1@2780.77,2136.23 ccw(c2765.73,2151.27) 2787,2151.27 ccw(c2808.27,2151.27) v1@2793.23,2136.23 ; v1@2780.77,2402.77 cw(c2765.73,2387.73) 2787,2387.73 cw(c2808.27,2387.73) v1@2793.23,2402.77 ; v1@2786.05,2024.24 ccw(c2784.45,2009.55) 2774,2020 ; v1(2787,2033) 2774,2020 ; v1(2787,2130) v1(2787,2409)
USBD-: CN.7 U100.37 | length 2272
  Top Layer w6: CN.7@2134,2937.41 2192.59,2937.41 2212.09,2917.91 2293.94,2917.91 2348.03,2972 v1(2388,2972) ; CN.7@2175.66,2931.18 cw(c2190.7,2916.14) 2190.7,2937.41 cw(c2190.7,2958.68) CN.7@2175.66,2943.64 ; v1@2381.77,2965.77 ccw(c2366.73,2950.73) 2366.73,2972 ccw(c2366.73,2993.27) v1@2381.77,2978.23 ; v1@2824.77,2065.23 ccw(c2809.73,2080.27) 2831,2080.27 ccw(c2852.27,2080.27) v1@2837.23,2065.23 ; v1@2824.77,2123.77 cw(c2809.73,2108.73) 2831,2108.73 cw(c2852.27,2108.73) v1@2837.23,2123.77 ; v1(2825,2401) 2837,2413 ; v1@2826.51,2409.68 ccw(c2828.56,2421.44) 2837,2413 ; v1(2831,2059) v1(2831,2130) ; v1@2833.68,2402.51 cw(c2845.44,2404.56) 2837,2413 ; U100.37@2854.9,2446.87 2854.9,2419.9 2848,2413 2837,2413
  Bottom Layer w6: v1@2381.77,2965.77 cw(c2366.73,2950.73) 2388,2950.73 cw(c2409.27,2950.73) v1@2394.23,2965.77 ; v1(2388,2972) 2388,2247.97 2603.97,2032 2756,2032 2783,2059 v1(2831,2059) ; 2815.25,2146.75 cw(c2798.5,2130) v1@2822.19,2130 ; v1@2816.19,2401 cw(c2794.92,2401) 2809.96,2385.96 cw(c2825,2370.92) v1@2825,2392.19 ; 2817.67,2144.33 ccw(c2831,2157.67) v1@2831,2138.81 ; v1@2824.77,2052.77 ccw(c2809.73,2037.73) 2809.73,2059 ccw(c2809.73,2080.27) v1@2824.77,2065.23 ; v1(2825,2401) 2799,2375 2799,2163 v1@2831,2131
VBUS: CN.5 U100.34 | length 1405.7
  Top Layer w6: CN.5@2134,2968.91 2252.91,2968.91 2280,2996 v1(2411,2996) ; CN.5@2175.66,2962.68 cw(c2190.7,2947.63) 2190.7,2968.91 cw(c2190.7,2990.18) CN.5@2175.66,2975.14 ; v1@2404.77,2989.77 ccw(c2389.73,2974.73) 2389.73,2996 ccw(c2389.73,3017.27) v1@2404.77,3002.23 ; v1@2789.61,2486.61 cw(c2774.57,2471.57) 2795.84,2471.57 cw(c2817.11,2471.57) v1@2802.07,2486.61 ; U100.34@2795.84,2446.87 v1(2795.84,2492.84)
  Bottom Layer w6: v1@2404.77,2989.77 cw(c2389.73,2974.73) 2411,2974.73 cw(c2432.27,2974.73) v1@2417.23,2989.77 ; v1(2411,2996) 2411,2534 2440,2505 2519,2505 2568,2554 2734.68,2554 v1(2795.84,2492.84) ; v1@2787.03,2492.84 ccw(c2765.76,2492.84) 2780.8,2507.88 ccw(c2795.84,2522.93) v1@2795.84,2501.65
VDDINT: C101.1 C102.2 C106.1 C107.1 C108.1 C109.1 C110.1 L100.1 pad.1@3477,2561 R100.2 U100.14 U100.30 U100.51 U100.61 U100.81 | length 1553.6
  Top Layer w8: U100.14@2543.87,2639.79 2570,2639 ; v1@2715.48,2839.52 ccw(c2702.14,2852.86) 2721,2852.86 ccw(c2739.86,2852.86) v1@2726.52,2839.52 ; U100.30@2717.1,2446.87 2717.1,2472.1 ; U100.81@2717.1,2931.13 2717.1,2904.9 2721,2901 v1(2721,2834) ; 2973.89,2793.37 2998,2793.37 3001.9,2797.27 U100.61@3028.13,2797.27
  Top Layer w10: v1@2930.58,2600.42 U100.51@3028.13,2600.42 ; v1@2934.82,2596.18 cw(c2945.04,2585.96) 2945.04,2600.42 ; v1@2934.82,2605.82 ccw(c2947.85,2618.85) 2947.85,2600.42
  Top Layer w20: 2570,2639 v1(2640,2639.79) ; 2717.1,2472.1 v1(2747,2502) ; v1(2721,2834) 2917,2834 2932,2819 v1(2932,2793.37) 2973.89,2793.37 ; v1(2930,2601) 3000.42,2601 ; pad.1@3477,2547.38 cw(c3477,2514.49) 3500.25,2537.75 cw(c3523.51,2561) pad.1@3490.62,2561 ; pad.1@3477,2561 3509,2529 ; 3601,2499 C102.2@3688.44,2499 R100.2@3688.44,2554
  Bottom Layer w20: C108.1@2536.56,2640 v1@2639.79,2640 ; C106.1@2704.72,2446.28 cw(c2735.68,2446.89) 2713.78,2468.78 ; C106.1@2717,2446.56 2717,2472 v1(2747,2502) ccw(c2800.83,2448.17) C106.1@2724.72,2446.67 ; v1(2721,2834) C110.1@2765.44,2834 ; 2749.25,2834 ccw(c2749.25,2858.23) C110.1@2766.38,2841.1 ; v1(2930,2601) 2990,2601 3009.1,2620.1 C107.1@3037.34,2620.1 ; C109.1@2932,2741.56 v1(2932,2793.37)
  other v1: 3593,2540 3611,2564 3577,2565
pads on no net: JTAG.NC U100.20 U100.21 U100.31 U100.33 U100.38
copper on no net: | length 1728
  Top Layer w6: 3549,3042 3549,3121 ; 3607,3042 3607,3121 ; 3665,3041 3665,3121 ; 3490,3041 3490,3121 3723,3121 3723,3041 3490,3041
  Bottom Layer w6: 3548,3041 3548,3121 ; 3606,3042 3606,3121 ; 3664,3042 3664,3121 ; 3490,3041 3490,3121 3723,3121 3723,3041 3490,3041

## Polygon pours and split planes (outlines as drawn)
GND on GND (split plane): 3933.9,1998.1 2225.1,1998.1 2225.1,2062 2224.71,2065.92 2223.57,2069.69 2221.71,2073.17 2219.21,2076.21 2216.17,2078.71 2212.69,2080.57 2208.92,2081.71 2205,2082.1 2096.1,2082.1 2096.1,2666.68 2096.32,2666.9 2209,2666.9 2211.47,2667.15 2211.47,2667.1 2212.09,2667.21 2212.92,2667.29 2213.36,2667.42 2216.52,2667.96 2222.01,2669.54 2227.28,2671.72 2232.27,2674.48 2236.93,2677.79 2241.18,2681.59 2244.98,2685.84 2248.29,2690.5 2251.05,2695.49 2253.23,2700.76 2254.81,2706.25 2255.77,2711.87 2256.09,2717.57 2255.77,2723.27 2254.81,2728.89 2253.23,2734.38 2251.05,2739.65 2248.29,2744.64 2244.98,2749.3 2241.18,2753.55 2236.93,2757.35 2232.27,2760.66 2227.28,2763.42 2222.01,2765.6 2216.52,2767.18 2214.58,2767.51 2213.92,2767.71 2213.12,2767.79 2210,2768.1 2096.1,2768.1 2096.1,3052.9 2205,3052.9 2208.92,3053.29 2212.69,3054.43 2216.17,3056.29 2219.21,3058.79 2221.71,3061.83 2223.57,3065.31 2224.71,3069.08 2225.1,3073 2225.1,3137.9 3933.9,3137.9
VDDINT on PWR (split plane): 2947.06,2810.71 2947.06,2560 2947.33,2557.94 2948.12,2556.03 2949.38,2554.38 3004.38,2499.38 3006.03,2498.12 3007.94,2497.33 3010,2497.06 3451,2497.06 3453.06,2497.33 3454.97,2498.12 3456.62,2499.38 3539.29,2582.06 3639.06,2582.06 3639.06,2440.94 3561,2440.94 3558.94,2440.67 3557.03,2439.88 3555.38,2438.62 3508.71,2391.94 2988.29,2391.94 2850.62,2529.62 2848.97,2530.88 2847.06,2531.67 2845,2531.94 2806,2531.94 2803.94,2531.67 2802.03,2530.88 2800.38,2529.62 2787.38,2516.62 2786.12,2514.97 2785.33,2513.06 2785.06,2511 2785.06,2475.94 2702.29,2475.94 2614.94,2563.29 2614.94,2630 2614.94,2658 2614.94,2852.06 2905.71,2852.06
D5V on PWR (split plane): 3933.9,1998.1 3768.93,1998.1 3768.93,2908 3768.59,2910.57 3767.6,2912.96 3766.02,2915.02 3763.96,2916.6 3761.57,2917.59 3759,2917.93 3487.11,2917.93 3393.02,3012.02 3390.96,3013.6 3388.57,3014.59 3386,3014.93 3275,3014.93 3272.43,3014.59 3270.74,3013.89 3270.04,3013.6 3269.14,3012.91 3267.98,3012.02 3251.89,2995.93 2823.11,2995.93 2779.02,3040.02 2776.96,3041.6 2774.57,3042.59 2772,3042.93 2572,3042.93 2569.43,3042.59 2567.04,3041.6 2564.98,3040.02 2536.98,3012.02 2454.89,2929.93 2096.1,2929.93 2096.1,3052.9 2205,3052.9 2208.92,3053.29 2212.69,3054.43 2216.17,3056.29 2219.21,3058.79 2221.71,3061.83 2223.57,3065.31 2224.71,3069.08 2225.1,3073 2225.1,3137.9 3933.9,3137.9
D3V3 on PWR (split plane): 2811.98,2978.98 2812.87,2978.3 2814.04,2977.4 2816.43,2976.41 2819,2976.07 3256,2976.07 3258.57,2976.41 3260.96,2977.4 3263.02,2978.98 3279.11,2995.07 3381.89,2995.07 3475.98,2900.98 3478.04,2899.4 3480.43,2898.41 3483,2898.07 3749.07,2898.07 3749.07,1998.1 2225.1,1998.1 2225.1,2062 2224.71,2065.92 2223.57,2069.69 2221.71,2073.17 2219.21,2076.21 2216.17,2078.71 2212.69,2080.57 2208.92,2081.71 2205,2082.1 2096.1,2082.1 2096.1,2666.68 2096.32,2666.9 2209,2666.9 2211.47,2667.15 2211.47,2667.1 2212.09,2667.21 2212.92,2667.29 2213.36,2667.42 2216.52,2667.96 2222.01,2669.54 2227.28,2671.72 2232.27,2674.48 2236.93,2677.79 2241.18,2681.59 2244.98,2685.84 2248.29,2690.5 2251.05,2695.49 2253.23,2700.76 2254.81,2706.25 2255.77,2711.87 2256.09,2717.57 2255.77,2723.27 2254.81,2728.89 2253.23,2734.38 2251.05,2739.65 2248.29,2744.64 2244.98,2749.3 2241.18,2753.55 2236.93,2757.35 2232.27,2760.66 2227.28,2763.42 2222.01,2765.6 2216.52,2767.18 2214.58,2767.51 2213.92,2767.71 2213.12,2767.79 2210,2768.1 2096.1,2768.1 2096.1,2910.07 2459,2910.07 2461.57,2910.41 2463.96,2911.4 2466.02,2912.98 2551.02,2997.98 2576.11,3023.07 2767.89,3023.07

## Keep-outs
Keep-Out Layer:
  the board outline again, w8

## Other copper
Top Layer:
  rectangle net VDDINT: 3562,2513 3628,2582
  rectangle net GND: 3836,2427 3927,2581
  rectangle net D5V: 3830,2259 3919,2360
  rectangle net GND: 3426,2309 3494,2379
  rectangle net D5V: 3830,2589 3919,2690
  rectangle net GND: 3836,2757 3927,2911
  rectangle net D3V3: 3463,2784 3620,2880
  rectangle net GND: 3426,2642 3493,2712
  region net VDDINT: 3465,2495 3552,2582 3628,2582 3628,2496 3618,2486 3618,2451 3465,2451
  text "1" at 3498,3049 h98.43
Bottom Layer:
  region net D5V: 2133,2972 2253,2972 2324,3043 2324,3088 2239,3088 2239,3036 2229,3026 2133,3026
  region net GND: 2133,2963 2253,2963 2330,3040 2330,3088 2418,3088 2418,3029 2298,2909 2133,2909
  text "4" at 3669,3047 h98.43
GND (plane layer: these items are gaps in the copper):
  region: 3600.38,3121.33 3724.67,3121.33 3725,3121 3725,3038 3600.38,3038
  region: 3538,3121.33 3538,3038 3487,3038 3487,3121.33
  text "2" at 3548,3048 h98.43
PWR (plane layer: these items are gaps in the copper):
  region: 3662,3037.85 3662,3122.33 3724.67,3122.33 3725,3122 3725,3038
  region: 3600,3037.85 3600,3122.33 3488,3122.33 3488,3038
  lines w15.75: 2607,2560 2699,2468 2793,2468 2793,2511 2806,2524 2845,2524 2985,2384 3512,2384 3561,2433 3647,2433 3647,2590 3536,2590 3451,2505 3010,2505 2955,2560 2955,2814 2909,2860 2607,2860 2607,2658 2607,2630 2607,2560
  lines w19.68: 2073,2920 2459,2920 2544,3005 2572,3033 2772,3033 2819,2986 3256,2986 3275,3005 3324,3005 3386,3005 3483,2908 3759,2908 3759,1987
  text "3" at 3610,3049 h98.43

## Silkscreen, mask and mechanical layers (free items; w line width, h text height)
Top Overlay:
  lines w7.87: 3320,2867 3327,2879 ; 3327,2847 3327,2879 ; 3334,2867 3327,2879 ; 3374,3119 3381,3107 ; 3381,3139 3381,3107 ; 3388,3119 3381,3107 ; 3685.38,2181.64 3698,2160 ; 3698,2203 3698,2160 ; 3710.62,2181.64 3698,2160 ; 2532,2167 2966,2167 2966,2381 2532,2381 2532,2167
  lines w10: 2252.96,2311.87 2325.13,2436.87 2397.3,2311.87 2252.96,2311.87
  text "BF70x DSP SOM Rev. B" at 2250,3073 h66.93
  text "3.3V" at 3482,2950 h62.99
  text "!" at 2317.13,2325.87 h118.11
  text "Max VCC" at 2251.13,2240.87 h62.99
  text "FAULT" at 3682,2213 h55.12
  text "5.5V" at 2251.13,2185.87 h62.99
  text ">_<" at 2244,2085.16 h118.11
  text "RF" at 2407,2070 h125.98
  text "RFPE.io" at 2244,2010 h62.99
Bottom Overlay:
  text "RF" at 3825,2403 h125.98 r270
  text "RFPE.io" at 3765,2240 h62.99 r270
  text ">_<" at 3840.16,2240 h118.11 r270
Top Solder:
  rectangle: 2068,2057 2186,3078
  region: 3487,3124 3487,3038 3725,3038 3725,3124
Bottom Solder:
  rectangle: 2068,2057 2186,3078
  region: 3487,3124 3487,3038 3725,3038 3725,3124
Mechanical 15:
  text "> FR4 1.0MM ENIG" at 2223,3232 h60